# Altium PCB num_one.PcbDoc
Units mil, origin at the board's own origin, x right, y up, seen from the top; angles counter-clockwise.
Board outline 3346.46 x 2204.72 mil, 2 copper layers (Top Layer, Bottom Layer); 54 components, 46 nets, 282 pads, 101 vias.
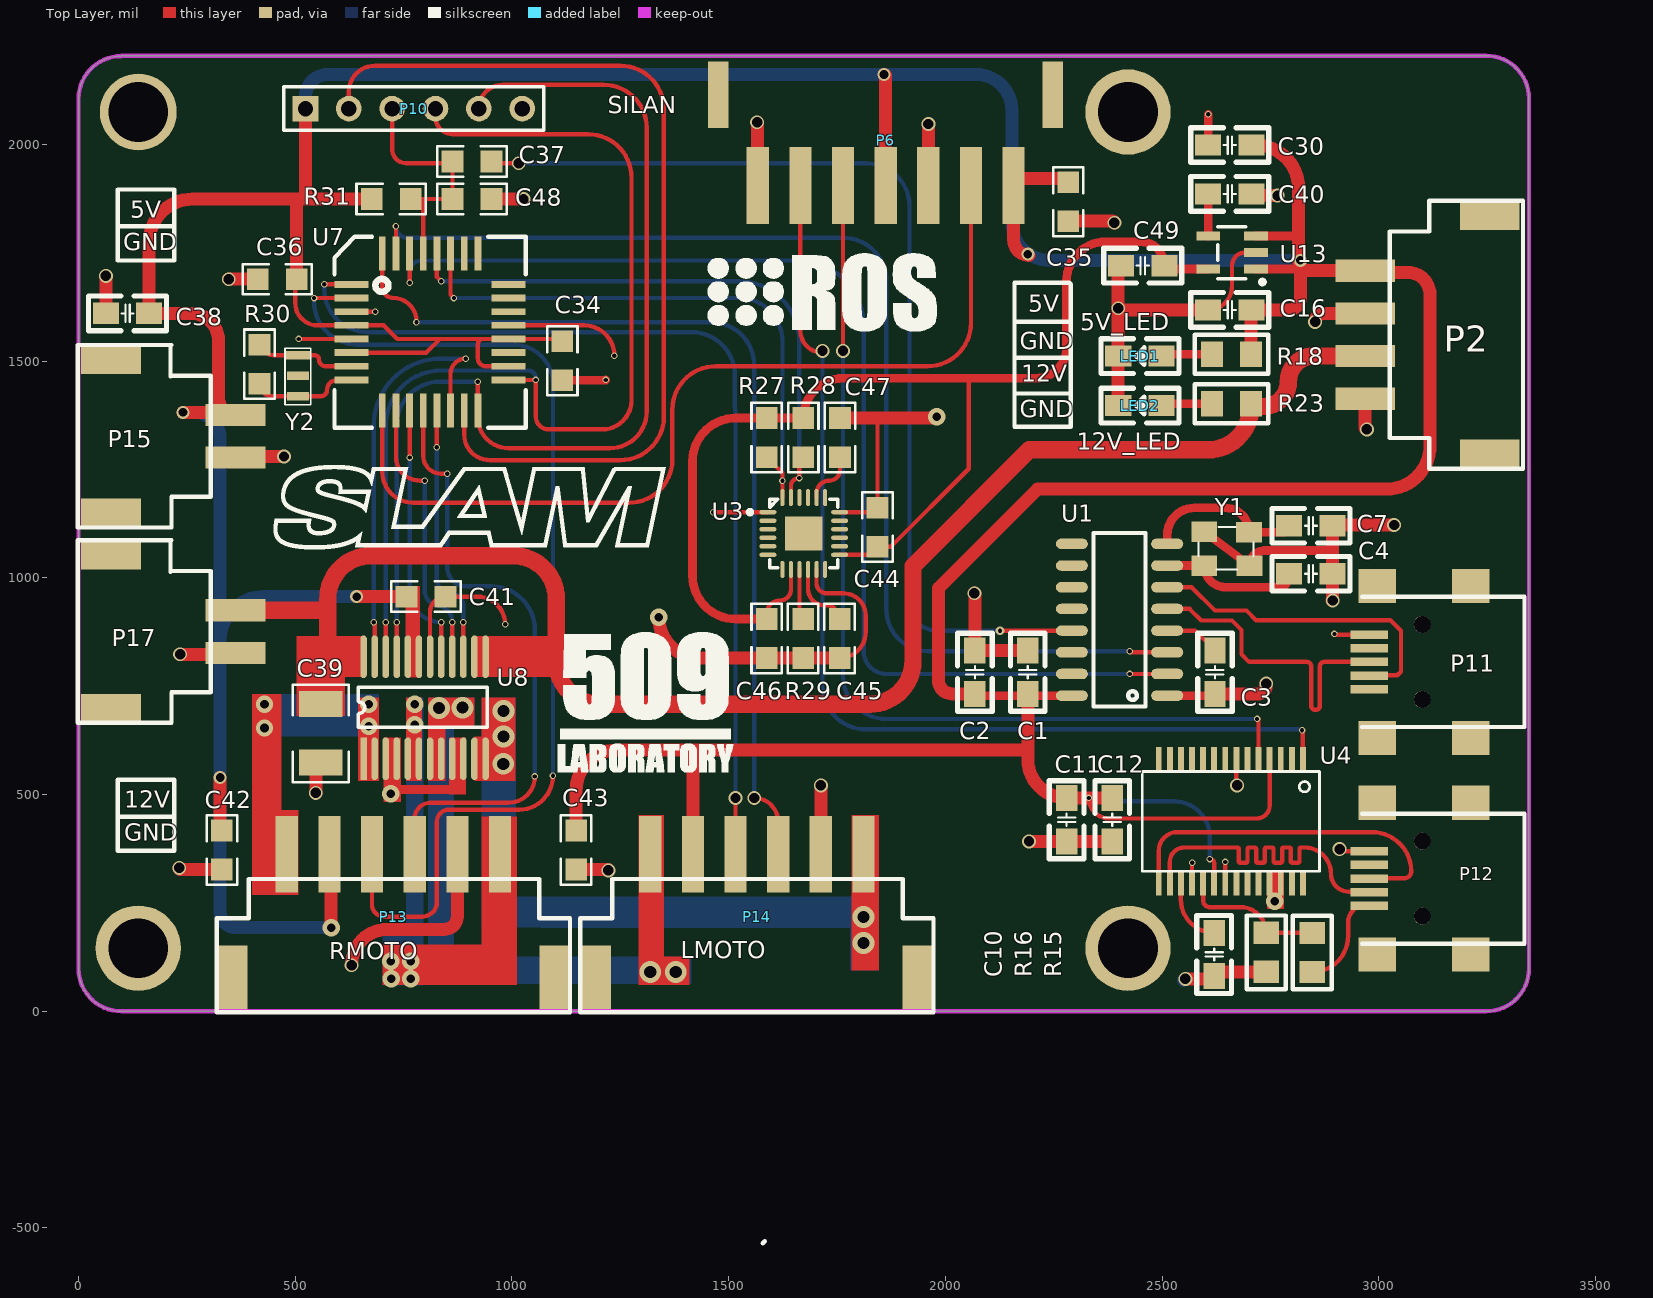
[diagram p0: Top Layer view]
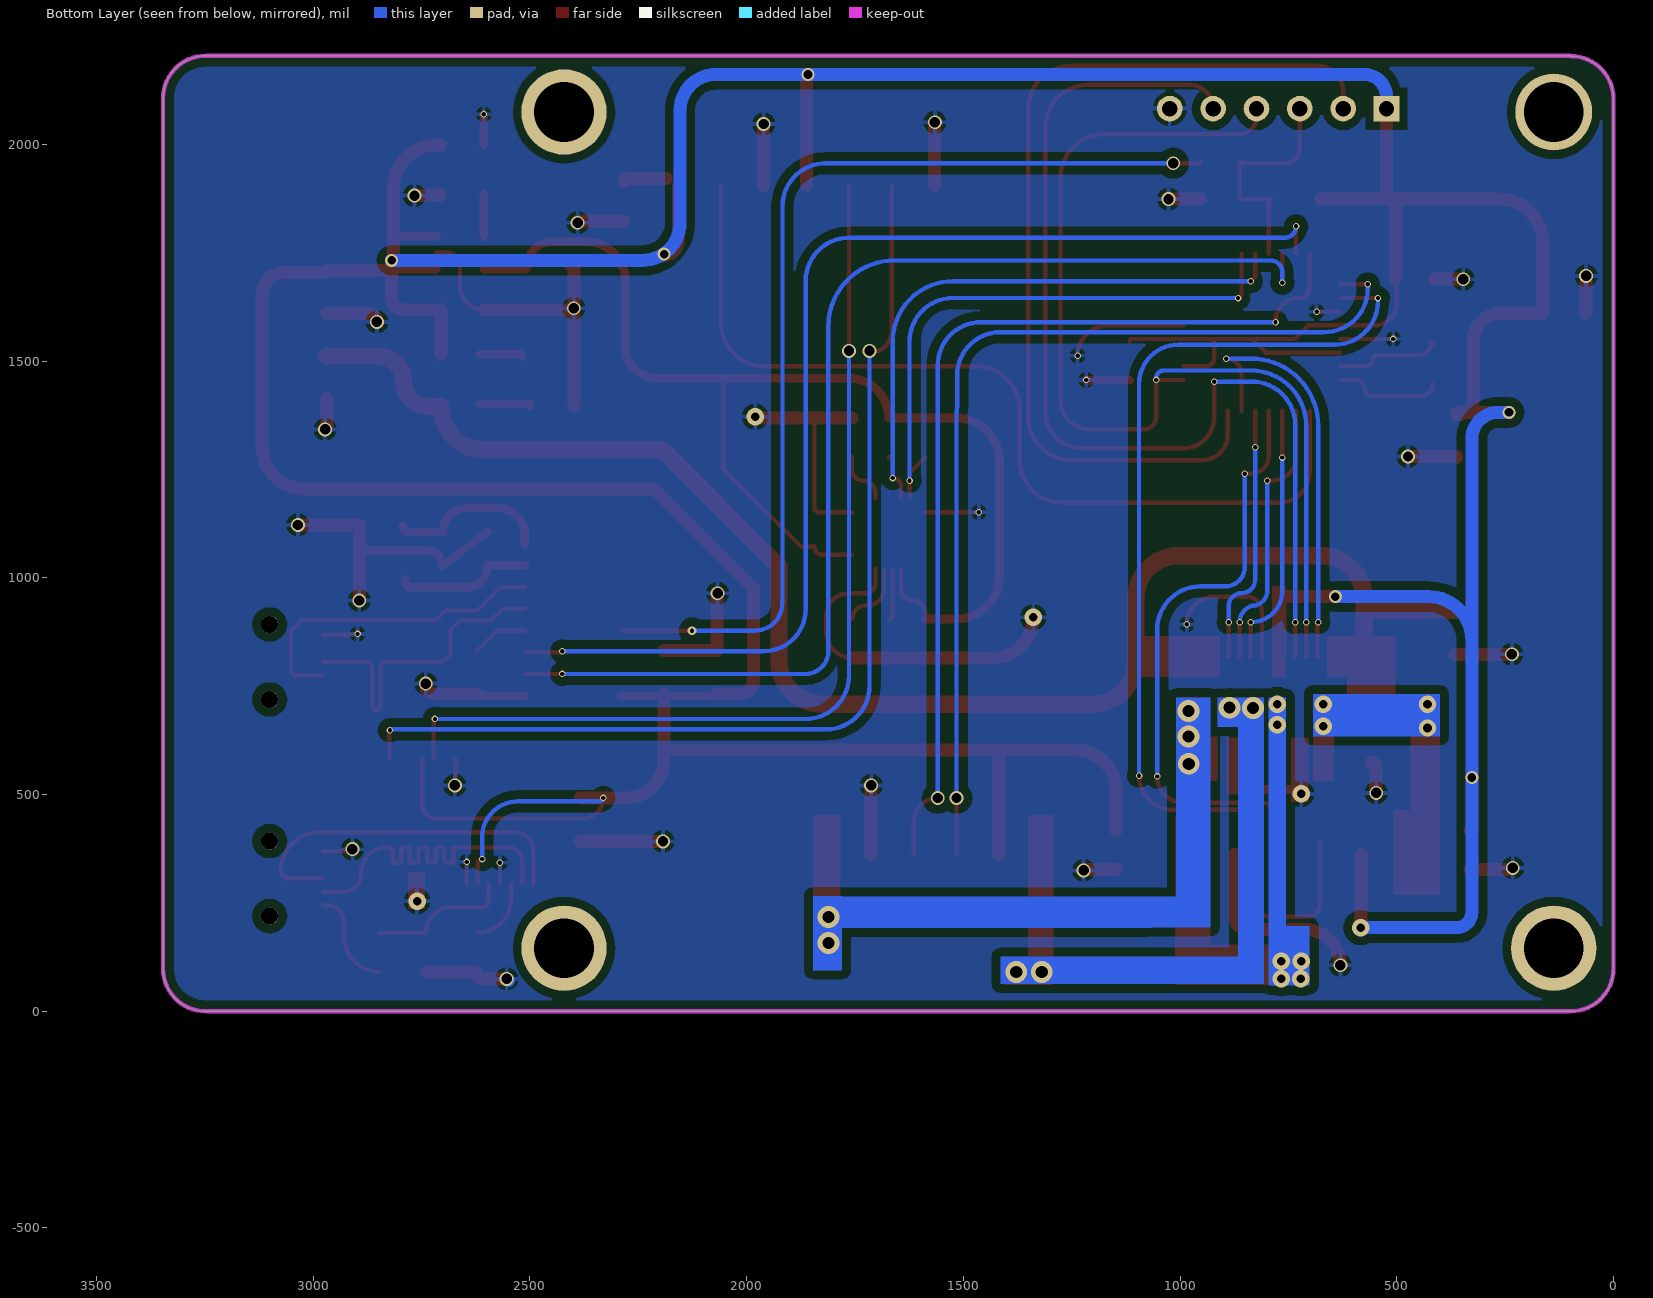
[diagram p1: Bottom Layer view, seen from below]

## Layer stack, top to bottom
Top Solder: solder mask 0.4, Solder Resist, Dk 3.5
Top Layer: signal copper 1.4
Dielectric 1: dielectric 12.6, FR-4, Dk 4.8
Bottom Layer: signal copper 1.4
Bottom Solder: solder mask 0.4, Solder Resist, Dk 3.5

## Board outline
0,98.43 0,2105.44 cw(c98.43,2105.44) 98.43,2203.87 98.43,2204.72 3248.03,2204.72 cw(c3248.03,2106.3) 3346.46,2106.3 3346.46,98.43 cw(c3248.03,98.43) 3248.03,0 98.43,0 cw(c98.43,98.43)

## Design rules (kind name [scope] priority, off if disabled: settings)
Clearance [All] p1: gap=6
ComponentClearance [All] p1: gap=0 collisioncheckmode=3 verticalgap=0 showdistances=FALSE
DiffPairsRouting [All] p1: maxlimit=10 minlimit=10 mostfreqgap=10 toplayer_minwidth=10 toplayer_maxwidth=15 toplayer_prefwidth=15 bottomlayer_minwidth=10 bottomlayer_maxwidth=15 bottomlayer_prefwidth=15 maxuncoupledlength=500
HoleSize [All] p1: absolutevalues=TRUE maxlimit=10000 minlimit=1 maxpercent=80.000 minpercent=20.000
HoleToHoleClearance [All] p1: gap=0 allowstackedmicrovias=TRUE
MinimumSolderMaskSliver [All] p1: minsoldermaskwidth=1
PlaneClearance [All] p1: clearance=78.74
PolygonConnect [All] p1: connectstyle=Relief reliefconductorwidth=10 reliefentries=4 polygonreliefangle="90 Angle" airgapwidth=10
RoutingCorners [All] p1: cornerstyle=Round minsetback=100 maxsetback=100
RoutingVias [All] p1: holewidth=10 width=20 viastyle="Through Hole" minholewidth=6 minwidth=10 maxholewidth=24 maxwidth=32
SMDNeckDown [All] p1: percent=100.000
SilkToSilkClearance [All] p1: silktosilkclearance=0
SilkToSolderMaskClearance [IsPad] p1: minsilkscreentomaskgap=1 clearancetoexposedcopper=TRUE
SolderMaskExpansion [All] p1: expansion=4
Width [All] p1: maxlimit=200 minlimit=10 preferedwidth=10
21 further rules are at their usual default settings.

## Components (designator, comment, footprint, x,y, rotation, side; value= is the part's Value field where it differs from the comment)
C1 "10uF" 0805C 2190.13,732.28 r90 top
C2 "0.1uF" 0805C 2068.08,732.28 r90 top
C3 "0.1uF" 0805C 2622.05,732.28 r90 top
C4 "22pF" 0805C 2793.35,1009.45 r0 top
C7 "22pF" 0805C 2793.35,1120.32 r0 top
C10 "0.1uF" 0805C 2620.16,181.1 r270 top
C11 "10uF" 0805C 2279.72,492.01 r270 top
C12 "0.1uF" 0805C 2384.86,492.01 r270 top
C16 "10uF" 0805C 2606.3,1618.11 r0 top
C30 "10uF" 0805C 2606.3,1998.7 r0 top
C34 "0.1uf" 0805 1116.14,1455.87 r90 top
C35 "0.1uF" 0805 2283.46,1822.83 r90 top
C36 "0.1uF" 0805 413.39,1688.98 r0 top
C37 "0.1uf" 0805 952.76,1960.63 r180 top
C38 "0.1uf" 0805C 62.99,1610.24 r0 top
C39 "220uF/35V" 1210 558.78,573.45 r90 top
C40 "0.1uf" 0805C 2706.3,1885.83 r180 top
C41 "0.1uF" 0805 846.46,956.69 r180 top
C42 "0.1uF" 0805 330.71,327.09 r90 top
C43 "0.1uF" 0805 1147.91,327.09 r90 top
C44 "0.1uF" 0805 1843.17,1072.09 r90 top
C45 "0.1uF" 0805 1755.87,814.96 r90 top
C46 "0.1uF" 0805 1587.62,814.96 r90 top
C47 "2200pf" 0805 1756.91,1278.65 r90 top
C48 "22pf" 0805 952.76,1874.02 r180 top
C49 "10uf" 0805C 2405.51,1720.47 r0 top
LED1 "5V_LED" 0805D 2448.82,1511.81 r180 top
LED2 "12V_LED" 0805D 2448.82,1397.64 r180 top
P2 "12V_5V_4A" 2.54-4P 2968.5,1708.66 r270 top
P6 "SILAN" "2.54-7P li" 1566.93,1905.51 r0 top
P10 "ISP" HDR1X6 523.62,2082.68 r0 top
P11 "MINIUSB" USB_MINI 2996.06,996.06 r270 top
P12 "MINIUSB" USB_MINI 2996.06,496.06 r270 top
P13 "RMOTO" 2.54-6P 972.44,362.2 r180 top
P14 "LMOTO" 2.54-6P 1811.02,362.2 r180 top
P15 "MOTO" 2.54-2P 362.2,1277.56 r90 top
P17 "MOTO" 2.54-2P 362.2,826.77 r90 top
R15 "4.7K" 0805_RES 2846.46,90.55 r90 top
R16 "10K" 0805_RES 2740.16,181.1 r270 top
R18 "1K" 0805_RES 2705.04,1515.75 r180 top
R23 "2.2K" 0805_RES 2705.04,1401.57 r180 top
R27 "4.7K" 0805 1587.62,1368.65 r270 top
R28 "4.7K" 0805 1672.27,1368.65 r270 top
R29 "4.7K" 0805 1671.75,814.96 r90 top
R30 "1M" 0805 417.32,1538.04 r270 top
R31 "100K" 0805 676.27,1874.02 r0 top
U1 "CH340G" SO-16_CH340 2511.81,728.35 r90 top
U3 "MPU6050" QFN24 1673.23,1102.36 r0 top locked
U4 "FT232RL" FT232RL 2653.54,438.05 r180 top
U7 "ATmega328" QFP32 629.92,1677.17 r0 top
U8 "TB6612FNG" SSOP24 657.48,582.68 r90 top
U13 "RT9193-33GB" SOT23-5 2716.54,1712.6 r90 top
Y1 "12MHz" XTAL-3225 2649.61,1066.93 r270 top
Y2 "16MHz" TCJZ-3 476.38,1529.45 r270 top

## Footprints (in the part's own frame and the unit in brackets; to place one, negate y for a bottom-side part, rotate by r counter-clockwise, add the part's x,y. Pads: shape width x height; smd on the part's side, far side on the other; paste and mask are expansions set on the pad)
2.54-2P [mm]
  rect 1.6x3.5 smd: 0(-3.2,7.3) 0(5.7,7.3)
  rect 1.3x3.5 smd: 1(0,0) 2(2.5,0)
  silkscreen extent -4.1,1.45 6.6,9.25
2.54-4P [mm]
  rect 1.6x3.5 smd: 0(-3.2,7.3) 0(10.7,7.3)
  rect 1.3x3.5 smd: 1(0,0) 2(2.5,0) 3(5,0) 4(7.5,0)
  silkscreen extent -4.1,1.45 11.6,9.25
2.54-6P [mm]
  rect 1.8x3.9 smd: 0(-3.2,7.3) 0(15.7,7.3)
  rect 1.3x4.5 smd: 1(0,0) 2(2.5,0) 3(5,0) 4(7.5,0) 5(10,0) 6(12.5,0)
  silkscreen extent -4.1,1.45 16.6,9.25
"2.54-7P li" [mm]
  rect 1.2x3.9 smd: 0(-2.3,5.3) 0(17.3,5.3)
  rect 1.3x4.5 smd: 1(0,0) 2(2.5,0) 3(5,0) 4(7.5,0) 5(10,0) 6(12.5,0) 7(15,0)
0805 [mil]
  rect 50x50 smd: 1(0,0) 2(90,0)
  silkscreen extent -35,-35 125,35
0805_RES [mm]
  rect 1.3x1.5 smd: 1(0,0) 2(2.286,0)
  silkscreen extent -1.02,-1.14 3.3,1.14, body extent 0.14,-0.63 2.14,0.63, height 0.55
0805C [mil]
  rect 60x49.21 smd: 1(0,0) 2(100,0)
  silkscreen extent -40,-40 140,40
0805D [mil]
  rect 60x49.21 smd: A(-50,0) K(50,0)
  silkscreen extent -90,-40 90,40
1210 [mil]
  rect 60x100 smd: 1(0,0) 2(135,0)
  silkscreen extent -45,-65 180,65
FT232RL [mil]
  rect 13.7x55 smd: 1(-171.34,-143.94) 2(-145.75,-143.94) 3(-120.16,-143.94) 4(-94.57,-143.94) 5(-68.98,-143.94) 6(-43.39,-143.94) 7(-17.8,-143.94) 8(7.8,-143.94) 9(33.39,-143.94) 10(58.98,-143.94) 11(84.57,-143.94) 12(110.16,-143.94) 13(135.75,-143.94) 14(161.34,-143.94) 15(161.34,143.94) 16(135.75,143.94) 17(110.16,143.94) 18(84.57,143.94) 19(58.98,143.94) 20(33.39,143.94) 21(7.8,143.94) 22(-17.8,143.94) 23(-43.39,143.94) 24(-68.98,143.94) 25(-94.57,143.94) 26(-120.16,143.94) 27(-145.75,143.94) 28(-171.34,143.94)
  silkscreen extent -210,-115 200,115
HDR1X6 [mm] "Connector; Header; 6 Position"
  rect 1.5x1.5 hole 0.9: 1(0,0)
  round 1.5 hole 0.9: 2(2.54,0) 3(5.08,0) 4(7.62,0) 5(10.16,0) 6(12.7,0)
  silkscreen extent -1.27,-1.27 13.97,1.27
QFN24 [mm]
  oval 1x0.25 smd: 1(-2.104,1.25) 2(-2.104,0.75) 3(-2.104,0.25) 4(-2.104,-0.25) 5(-2.104,-0.75) 6(-2.104,-1.25) 13(2.104,-1.25) 14(2.104,-0.75) 15(2.104,-0.25) 16(2.104,0.25) 17(2.104,0.75) 18(2.104,1.25)
  oval 0.25x1 smd: 7(-1.25,-2.104) 8(-0.75,-2.104) 9(-0.25,-2.104) 10(0.25,-2.104) 11(0.75,-2.104) 12(1.25,-2.104) 19(1.25,2.104) 20(0.75,2.104) 21(0.25,2.104) 22(-0.25,2.104) 23(-0.75,2.104) 24(-1.25,2.104)
  rect 2.2x2 smd: 25(0,0)
  silkscreen extent -3.28,-2 2,2, body extent -1.78,-1.78 1.78,1.78, height 0.25
QFP32 [mm]
  rect 2x0.4 smd: 1(0,0) 2(0,-0.8) 3(0,-1.6) 4(0,-2.4) 5(0,-3.2) 6(0,-4) 7(0,-4.8) 8(0,-5.6) 17(9.2,-5.6) 18(9.2,-4.8) 19(9.2,-4) 20(9.2,-3.2) 21(9.2,-2.4) 22(9.2,-1.6) 23(9.2,-0.8) 24(9.2,0)
  rect 0.4x2 smd: 9(1.8,-7.4) 10(2.6,-7.4) 11(3.4,-7.4) 12(4.2,-7.4) 13(5,-7.4) 14(5.8,-7.4) 15(6.6,-7.4) 16(7.4,-7.4) 25(7.4,1.8) 26(6.6,1.8) 27(5.8,1.8) 28(5,1.8) 29(4.2,1.8) 30(3.4,1.8) 31(2.6,1.8) 32(1.8,1.8)
  silkscreen extent -1,-8.4 10.2,2.8
SO-16_CH340 [mil]
  oval 24x74 smd: 1(0,0) 2(50,0) 3(100,0) 4(150,0) 5(200,0) 6(250,0) 7(300,0) 8(350,0) 9(350,220) 10(300,220) 11(250,220) 12(200,220) 13(150,220) 14(100,220) 15(50,220) 16(0,220)
  silkscreen extent -25,50 375,170, body extent -19,-5 367,223, height 69
SOT23-5 [mil]
  rect 20x55 smd: 1(0,0) 2(38,0) 3(76,0) 4(76,110) 5(0,110)
  silkscreen extent -35,-20 98,88
SSOP24 [mm]
  rect 2.5x0.381 smd: 1(0,0)
  oval 2.5x0.381 smd: 2(0,-0.65) 3(0,-1.3) 4(0,-1.95) 5(0,-2.6) 6(0,-3.25) 7(0,-3.9) 8(0,-4.55) 9(0,-5.2) 10(0,-5.85) 11(0,-6.5) 12(0,-7.15) 13(5.975,-7.15) 14(5.975,-6.5) 15(5.975,-5.85) 16(5.975,-5.2) 17(5.975,-4.55) 18(5.975,-3.9) 19(5.975,-3.25) 20(5.975,-2.6) 21(5.975,-1.95) 22(5.975,-1.3) 23(5.975,-0.65) 24(5.975,0)
  silkscreen extent 1.85,-7.24 4.2,0.32
TCJZ-3 [mm]
  rect 0.5x1.4 smd: 1(0.4,0.762)
  rect 0.5x1.3 smd: 2(1.6,0.762) 3(2.8,0.762)
  silkscreen extent 0,0 3.3,1.5
USB_MINI [mm]
  rect 2x2.2 smd: 0(0.376,5.5) 0(0.376,0) 0(9.276,0) ""(9.276,5.5)
  rect 0.5x2.2 smd: 1(6.426,-0.45) 2(5.626,-0.45) 3(4.826,-0.45) 4(3.226,-0.45) NC(4.026,-0.45)
  round 1 hole 1: ""(2.626,2.65) ""(7.026,2.65)
  silkscreen extent 1.02,-0.89 8.64,8.64
XTAL-3225 [mil]
  rect 47.24x59.06 smd: 1(-38.5,51) 2(-39.5,-52) 3(39.5,-52) 4(38.5,52)
  silkscreen extent -50,-65 48,61, body extent -50,-65 48,61, height 31

## Part data
C1 C2 C3 C4 C7 C10 C11 C12 C16 C30: library part CAP
C34 C35 C36 C37 C39 C41 C42 C43 C48: library part Cap
C38: library part Cap, "capacitor"
C40 C49: library part Cap, "Capacitor"
C44 C45 C46 C47: library part Cap, "0805贴片电容"
LED1 LED2: library part LED
P2: library part "Header 4", "Header, 4-Pin"
P6: library part "Header 7", "Header, 7-Pin"
P10: library part "Header 6", "2.54-6P排针"
P11 P12: library part USB-B, "贴片"
P13 P14: library part "Header 6", "2.54-6P卧贴"
P15 P17: library part 2P, "3.81-2P"
R15 R16 R18 R23 R27 R28: library part RES
R29: library part Res2, "Resistor"
R30 R31: library part Res2
U1 U4: "USBоƬ"
U7: library part ATmega8-16AC, "8位单片机"
U8: library part TB6612, "电机驱动芯片"
U13: library part RT9193, "电源芯片"
Y1: library part XTAL, "有源晶振"
Y2: library part XTAL, "3212村田陶瓷晶振"

## Free pads (board coordinates)
  round 177.17 hole 137.8: 1(137.8,2074.8)
  round 196.85 hole 137.8: 2(137.79,145.67) 3(2421.26,145.67) 4(2421.26,2074.8)

## Via types
v1: diameter 15, hole 10, Top Layer to Bottom Layer, 40 vias
v2: diameter 32, hole 24, Top Layer to Bottom Layer, 30 vias
v3: diameter 40, hole 20, Top Layer to Bottom Layer, 15 vias
v4: diameter 50, hole 28, Top Layer to Bottom Layer, 9 vias
v5: diameter 30, hole 20, Top Layer to Bottom Layer, 6 vias
v6: diameter 20, hole 10, Top Layer to Bottom Layer, 1 vias

## Nets (pads, with @x,y where several pads share a name; then routed paths per layer and width w, separated by ;. In a path a pad name is that pad's centre, name@x,y a point inside that pad or via, vN(x,y) a via of type N, cw(c..) or ccw(c..) an arc to the next point about the centre after c; other vN are vias at no path point)
2: P14.3 U7.32 | length 2198.8
  Top Layer w10: U7.32 700.79,1671.17 ccw(c726.29,1671.17) 726.29,1645.67 cw(c726.29,1592.43) 779.53,1592.43 v1(779.53,1589.96) ; v2(1559.06,492.13) cw(c1559.06,437.01) 1614.17,437.01 P14.3
  Bottom Layer w10: v1(779.53,1589.96) 1459.06,1589.96 cw(c1459.06,1489.96) 1559.06,1489.96 v2(1559.06,492.13)
3: P14.4 U7.1 | length 2239.6
  Top Layer w10: v1(566.93,1677.17) U7.1 ; P14.4 v2(1515.75,492.13)
  Bottom Layer w10: v1(566.93,1677.17) 566.93,1666.93 ccw(c666.93,1666.93) 666.93,1566.93 1414.36,1566.93 cw(c1414.36,1466.93) 1514.36,1466.93 1514.36,1393.98 cw(c1357.29,1373.03) 1515.75,1373.03 v2(1515.75,492.13)
4: P13.4 U7.2 | length 2500.9
  Top Layer w10: v1(543.31,1645.67) U7.2 ; P13.4@677.17,390.51 P13.4 677.17,246 ccw(c704.72,246) 677.19,244.91 ccw(c704.72,246) 704.72,218.44 793.18,218.44 ccw(c793.18,251.97) 826.71,251.97 826.71,437.38 cw(c854.33,437.38) 854.33,465 1016.18,465 ccw(c1016.18,543.31) v1(1094.49,543.31)
  Bottom Layer w10: v1(543.31,1645.67) 543.31,1638.04 ccw(c643.31,1638.04) 643.31,1538.04 1003.94,1538.04 cw(c1003.94,1447.49) 1094.49,1447.49 v1(1094.49,543.31)
5: P6.6 U7.9 | length 2143.7
  Top Layer w10: U7.9 700.79,1244.78 ccw(c772.34,1244.78) 772.34,1173.23 1270.08,1173.23 ccw(c1270.08,1273.23) 1370.08,1273.23 1370.08,1388.19 cw(c1470.08,1388.19) 1470.08,1488.19 1959.06,1488.19 ccw(c1959.06,1588.19) 2059.06,1588.19 P6.6
5V: C1.1 C2.1 C11.1 C12.1 C16.2 C30.2 C34.2 C35.2 C36.2 C38.2 C41.2 C42.2 C43.2 P2.1 P6.4 P6.7 P10.1 P13.5 P14.5 P15.2 R18.1 R31.1 U1.16 U4.4 U4.20 U7.4 U7.6 U7.18 U7.20 U8.19 U8.20 U13.1 U13.3 | length 14606
  Top Layer w10: C36.2 ccw(c503.39,1685.59) 500,1685.59 500,1633.86 ccw(c551.18,1633.86) 551.18,1582.68 U7.4 703.75,1582.68 735.25,1551.18 833.87,1551.18 ; U7.6 802.37,1519.69 833.87,1551.18 ; C41.2@759.84,953.31 U8.20 U8.19 ; U7.18 939.57,1488.19 cw(c939.57,1506.5) 921.26,1506.5 921.26,1539.37 cw(c933.07,1539.37) 933.07,1551.18 ; C34.2 ccw(c1110.83,1545.87) 1110.83,1551.18 U7.20 933.07,1551.18 ; v1@2330.71,492.01 ccw(c2377.83,492.01) 2377.83,444.88 2718.87,444.88 ccw(c2718.87,474.12) 2748.11,474.12 U4.4 ; v1(2610.24,351.3) cw(c2610.24,341.38) 2620.16,341.38 ; U4.20 2620.16,340.61 ; 833.87,1551.18 933.07,1551.18
  Top Layer w20: C41.2 cw(c756.46,953.31) C41.2@759.84,953.31 ; C2.1 ccw(c2072.02,732.28) 2072.02,728.35 2190.13,728.35 U1.16 ; U13.1 2814.96,1712.6 ; U13.3 2812.98,1788.6 ccw(c2812.98,1790.58) 2814.96,1790.58
  Top Layer w30: v5(240.86,1381.89) P15.2@341.47,1381.89 ; v5(326.77,539.37) 326.77,421.02 ccw(c330.71,421.02) C42.2 ; C36.2 503.39,1870.63 ccw(c500,1870.63) 500,1874.02 ; P10.1 523.62,1877.95 cw(c519.69,1877.95) 519.69,1874.02 ; P13.5 cw(c578.74,358.27) 582.68,358.27 v3(582.68,192.91) ; v5(641.73,956.69) C41.2 ; R31.1 519.69,1874.02 ; C43.2 1147.91,510.12 cw(c1240.16,510.12) 1240.16,602.36 1417.32,602.36 ; P14.5 1417.32,602.36 ; v5(1858.27,2161.42) cw(c1858.27,2157.48) 1862.2,2157.48 P6.4 ; C2.1 2015.75,732.28 cw(c2015.75,763.78) 1984.25,763.78 1984.25,976.38 2212.6,1204.72 3018.11,1204.72 ccw(c3018.11,1304.72) 3118.11,1304.72 3118.11,1653.54 ccw(c3066.93,1653.54) 3066.93,1704.72 2972.44,1704.72 cw(c2972.44,1708.66) P2.1 2838.9,1708.66 cw(c2838.9,1732.6) v5@2818.9,1719.45 ; P6.7 2157.48,1779.53 ccw(c2192.91,1779.53) 2192.91,1744.09 cw(c2192.91,1746.88) v5(2190.13,1746.88) ; 2185.04,1921.26 2275.04,1921.26 cw(c2275.04,1912.83) C35.2 ; C1.1 2190.13,728.35 2190.13,606.3 ; v1@2330.71,492.01 C12.1 ; v1(2330.71,492.13) 2279.72,492.13 C11.1 cw(c2279.72,581.6) 2190.13,581.6 2190.13,606.3 ; R18.1 2705.04,1616.85 cw(c2706.3,1616.85) C16.2 2791.34,1618.11 ccw(c2791.34,1645.67) 2818.9,1645.67 v5@2818.9,1719.45 ; C30.2 2714.96,1998.7 cw(c2714.96,1898.7) 2814.96,1898.7 2814.96,1790.58 2814.96,1732.6 ccw(c2838.9,1732.6) v5@2818.9,1719.45 ; P15.2@341.47,1381.89 cw(c362.2,1415.35) 322.83,1415.35 322.83,1547.24 ccw(c259.84,1547.24) 259.84,1610.24 C38.2 162.99,1774.02 cw(c262.99,1774.02) 262.99,1874.02 500,1874.02 ; P15.2@341.47,1381.89 ccw(c362.2,1415.35) P15.2 ccw(c356.3,1375.98) 356.3,1381.89 P15.2@341.47,1381.89 ; 500,1874.02 519.69,1874.02 ; 1417.32,602.36 2186.19,602.36 ccw(c2186.19,606.3) 2190.13,606.3
  Bottom Layer w10: v1(2330.71,492.13) ccw(c2338.58,492.13) 2338.58,484.25 2527.56,484.25 cw(c2527.56,401.57) 2610.24,401.57 v1(2610.24,351.3)
  Bottom Layer w30: v5(240.86,1381.89) 265.75,1381.89 cw(c265.75,1320.87) 326.77,1320.87 326.77,856.69 ; P10.1 523.62,2110.24 cw(c574.8,2110.24) 574.8,2161.42 v5(1858.27,2161.42) 2070.87,2161.42 cw(c2070.87,2078.74) 2153.54,2078.74 2153.54,1819.21 ccw(c2240.16,1819.21) 2240.16,1732.6 v5(2818.9,1732.6) ; v3(582.68,192.91) 362.2,192.91 cw(c362.2,228.35) 326.77,228.35 v5(326.77,539.37) 326.77,856.69 ; v5(641.73,956.69) 426.77,956.69 ccw(c426.77,856.69) 326.77,856.69
6: U7.10 U8.16 | length 643.8
  Top Layer w10: U7.10 732.28,1279.53 ccw(c787.4,1279.53) 787.4,1224.41 v1(798.64,1224.41) ; U8.16 v1(862.2,897.64)
  Bottom Layer w10: v1(798.64,1224.41) 798.64,970.85 ccw(c833.87,970.85) 824.1,937 ccw(c833.87,970.85) 833.87,935.62 cw(c823.62,898.43) 862.2,898.43 v1(862.2,897.64)
7: U7.11 U8.17 | length 609.5
  Top Layer w10: v1(763.78,1277.56) U7.11 ; U8.17 v1(836.61,897.64)
  Bottom Layer w10: v1(763.78,1277.56) 763.78,970.47 ccw(c836.61,970.47) v1(836.61,897.64)
8: P13.3 U7.12 | length 1440.8
  Top Layer w10: P13.3@775.59,358.27 P13.3 775.59,445.63 cw(c811.02,445.63) 811.02,481.06 992.13,481.06 ccw(c992.13,541.69) v1(1052.75,541.69) ; U7.12 795.28,1281.5 ccw(c836.61,1281.5) 836.61,1240.16 v1(850.39,1240.16)
  Bottom Layer w10: v1(850.39,1240.16) 850.39,1025.8 ccw(c895.89,1025.8) 895.89,980.3 952.75,980.3 cw(c952.75,880.3) 1052.75,880.3 v1(1052.75,541.69)
9: U7.13 U8.15 | length 602.7
  Top Layer w10: v1(826.77,1301.18) U7.13 ; U8.15 v1(887.8,897.64)
  Bottom Layer w10: v1(826.77,1301.18) 826.77,996.06 ccw(c858.27,996.06) 858.27,964.57 cw(c858.27,935.04) 887.8,935.04 v1(887.8,897.64)
10: U7.14 U8.23 | length 975.4
  Top Layer w10: v1(681.1,897.64) cw(c681.1,895.67) 683.07,895.67 U8.23 ; U7.14 858.27,1470.47 cw(c893.7,1470.47) v1(893.7,1505.91)
  Bottom Layer w10: v1(681.1,897.64) 681.1,1350.79 cw(c836.22,1350.79) 836.22,1505.91 v1(893.7,1505.91)
11: P10.2 U7.15 | length 2173.6
  Top Layer w10: P10.2 623.62,2122.08 cw(c683.07,2122.08) 683.07,2181.52 1250.39,2181.52 cw(c1250.39,2081.52) 1350.39,2081.52 1350.39,1371.65 cw(c1250.39,1371.65) 1250.39,1271.65 948.82,1271.65 cw(c948.82,1330.71) 889.76,1330.71 889.76,1340.94 U7.15
12: P10.5 U7.16 U8.21 | length 2476.1
  Top Layer w10: U8.21 v1(734.25,897.64) ; v1(921.26,1452.76) U7.16 921.26,1370.08 ccw(c992.13,1370.08) 992.13,1299.21 1225.91,1299.21 ccw(c1225.91,1384.33) 1311.02,1384.33 1311.02,2037.8 ccw(c1211.02,2037.8) 1211.02,2137.8 978.74,2137.8 ccw(c978.74,2082.68) P10.5 P10.5@923.62,2076.38
  Bottom Layer w10: v1(734.25,897.64) 734.25,1352.76 cw(c834.25,1352.76) 834.25,1452.76 v1(921.26,1452.76)
12V: C39.2 P2.3 P17.2 R23.1 U8.13 U8.14 U8.24 | length 3588.4
  Top Layer w30: C39.2@535.43,731.8 ccw(c558.78,731.8) C39.2
  Top Layer w40: P17.2 563.35,925.2 574.8,913.74 ; 574.8,834.65 574.8,913.74 ; P2.3 2850.39,1511.81 ccw(c2850.39,1452.76) 2791.34,1452.76 cw(c2733.86,1452.76) 2733.86,1395.28 2705.04,1395.28 cw(c2605.04,1395.28) 2605.04,1295.28 2193.78,1295.28 1925.2,1026.69 1925.2,808.45 cw(c1825.2,808.45) 1825.2,708.45 1202.36,708.45 cw(c1202.36,808.45) 1102.36,808.45 1102.36,951.18 ccw(c1002.36,951.18) 1002.36,1051.18 674.8,1051.18 ccw(c674.8,951.18) 574.8,951.18 574.8,913.74
13: P10.4 U7.17 U8.22 | length 2471.5
  Top Layer w10: U8.22 v1(708.66,897.64) ; P10.4@823.62,2099.21 P10.4 823.62,2062.76 ccw(c862.76,2062.76) 862.76,2023.62 1175.59,2023.62 cw(c1175.59,1923.62) 1275.59,1923.62 1275.59,1409.45 cw(c1208.66,1409.45) 1208.66,1342.52 1084.25,1342.52 cw(c1084.25,1371.65) 1055.12,1371.65 v1(1055.12,1456.69) U7.17
  Bottom Layer w10: v1(708.66,897.64) 708.66,1350.79 cw(c836.22,1350.79) 836.22,1478.35 1037.4,1478.35 cw(c1037.4,1460.63) 1055.12,1460.63 v1(1055.12,1456.69)
AO1: P13.6 U8.1 U8.2
  other v3: 429.13,653.54 669.29,657.48 429.13,708.66 669.29,708.66
AO2: P13.1 U8.5 U8.6
  other v3: 721.46,74.8 766.5,74.8 720.47,115.53 766.34,115.53 775.59,661.42 775.59,708.66
BO1: P14.1 U8.11 U8.12 | length 956.9
  Bottom Layer w50: 979.71,352.13 v4(979.71,570.87) ; 1072.82,217.6 v4(1811.02,217.6)
  other v4: 1811.02,157.48 980.32,633.86 980.32,692.91
BO2: P14.6 U8.7 U8.8
  other v4: 1318.9,90.55 1377.95,90.55 831.65,699.84 885.83,700.5
DTR: C37.1 U1.13 | length 2349.4
  Top Layer w10: C37.1 ccw(c956.69,1960.63) 956.69,1956.69 v2(1015.75,1956.69) ; v6(2125.98,878.35) U1.13
  Bottom Layer w10: v2(1015.75,1956.69) 1817.32,1956.69 cw(c1817.32,1856.69) 1917.32,1856.69 1917.32,948.82 ccw(c1988.19,948.82) 1917.76,940.99 ccw(c1980.4,940.99) 1980.4,878.35 v6(2125.98,878.35)
GND: C1.2 C2.2 C3.1 C4.2 C7.2 C10.2 C11.2 C12.2 C16.1 C30.1 C34.1 C35.1 C36.1 C38.1 C39.1 C40.1 C41.1 C42.1 C43.1 C44.2 C45.1 C46.1 C47.2 C48.1 C49.1 LED1.K LED2.K P2.2 P2.4 P6.1 P6.5 P10.6 P11.4 P12.4 P13.2 P14.2 P15.1 P17.1 R16.2 R29.1 U1.1 U3.1 U3.11 U3.18 U4.7 U4.18 U4.21 U4.25 U4.26 U7.3 U7.5 U7.21 U8.3 U8.4 U8.9 U8.10 U8.18 U13.2 Y1.2 Y1.4 | length 7171.9
  Top Layer w10: v1(507.87,1551.18) U7.5 ; U7.3 v1(684.79,1614.17) ; U8.18 811.02,921.26 cw(c846.46,921.26) C41.1 920.26,956.69 cw(c920.26,892.7) v1(984.25,892.7) ; U7.21 1166.09,1582.68 cw(c1166.09,1512.55) v1(1236.22,1512.55) ; v1(1464.17,1151.57) U3.1 ; U3.11 1702.76,987.52 ccw(c1725.71,987.52) 1725.71,964.57 1764.12,964.57 cw(c1764.12,912.51) 1816.17,912.51 1816.17,875.26 cw(c1755.87,875.26) 1799.08,833.19 cw(c1755.87,875.26) C45.1 ; U3.18 1832.66,1151.57 ccw(c1832.66,1162.09) C44.2 1843.17,1364.06 ccw(c1838.58,1364.06) 1838.58,1368.65 ; U4.18 2568.98,342.65 v1(2569.2,342.65) ; C16.1 ccw(c2606.3,1673.23) 2661.42,1673.23 2661.42,1720.47 cw(c2691.54,1720.47) 2691.54,1750.6 U13.2 ; U4.21 2645.75,344.57 v1(2645.85,344.57) ; U4.7 2671.34,523 ccw(c2673.23,523) v2(2673.23,521.11) ; v1(2897.64,870.51) ccw(c2899.1,870.51) 2899.1,869.06 P11.4 ; v2(2909.45,374.02) v2(2909.45,374.02) ccw(c2914.35,373.95) 2914.35,369.06 P12.4
  Top Layer w20: v3(720.47,501.52) cw(c730.69,501.52) 730.69,511.74 870.08,511.74 ; C34.1 1215.71,1455.87 ccw(c1215.71,1456.69) v1(1216.54,1456.69) ; U1.1 2618.11,728.35 ccw(c2618.11,732.28) C3.1 ; Y1.2 Y1.4 cw(c2736.17,1028.43) 2736.17,1062.99 2893.35,1062.99 ; C30.1 v1(2606.3,2069.75)
  Top Layer w30: C38.1 v2(62.99,1696.78) ; v2(232.28,330.7) ccw(c235.9,330.7) 235.9,327.09 C42.1 ; v2@234.18,823.74 v2(234.33,823.74) P17.1@365.23,823.74 ; v2(346.46,1688.98) C36.1 ; P15.1 cw(c364.6,1277.56) 364.6,1279.96 v2(474.09,1279.96) ; v2(547.24,503.92) 547.24,561.91 cw(c558.78,561.91) C39.1 ; v2(629.92,106.3) cw(c712.6,106.3) 712.6,188.98 843.79,188.98 ccw(c843.79,219.2) 874.02,219.2 P13.2 ; C48.1 v2(1026.61,1874.02) ; C43.1 1220.34,327.09 cw(c1220.34,324.95) v2(1222.47,324.95) ; v3(1338.69,908.95) ccw(c1432.68,908.95) 1432.68,814.96 C46.1 R29.1 C45.1 ; v2(1565.61,2051.18) cw(c1565.61,2049.86) 1566.93,2049.86 P6.1 ; P14.2 v2(1712.6,521.11) ; C47.2 1838.58,1368.65 1977.17,1368.65 ccw(c1977.17,1371.65) v3(1980.17,1371.65) ; P6.5 v2(1960.63,2047.24) ; v2(2066.93,964.57) cw(c2066.93,963.41) 2068.08,963.41 C2.2 C1.2 ; v2(2192.91,392.01) C11.2 C12.2 ; C35.1 2385.83,1822.83 cw(c2385.83,1818.9) 2389.76,1818.9 v2(2389.76,1819.21) ; LED2.K LED1.K v2(2398.82,1622.05) ; C49.1 ccw(c2405.51,1713.78) 2398.82,1713.78 v2(2398.82,1622.05) ; v2(2553.6,74.8) 2613.86,74.8 ccw(c2613.86,81.1) C10.2 cw(c2630.16,81.1) 2630.16,91.1 R16.2 ; C16.1 2402.76,1618.11 cw(c2402.76,1622.05) v2(2398.82,1622.05) ; C3.1 2720.89,732.28 ccw(c2720.89,751.55) 2740.16,751.55 v2(2740.16,755.91) ; C40.1 ccw(c2710.24,1885.83) 2710.24,1881.89 v2(2766.35,1881.89) ; v2(2853,1590.55) cw(c2872.68,1590.55) 2872.68,1610.24 P2.2 ; v2(2893.7,947.67) 2892.61,947.67 cw(c2892.61,948.82) 2891.46,948.82 ccw(c2891.46,950.71) 2893.35,950.71 C4.2 2893.35,1062.99 C7.2 cw(c2895.08,1120.32) 2895.08,1122.05 v2(3035.43,1122.05) ; P2.4 2968.5,1346.46 ccw(c2972.44,1346.46) v2(2972.44,1342.52)
  Bottom Layer w30: v2@2549.66,70.87 cw(c2553.6,70.87) v2(2553.6,74.8)
  other v3: 2760.16,254.11
MXTAL0: C4.1 U1.7 Y1.3 | length 315.1
  Top Layer w20: U1.7 2596.69,1028.35 cw(c2596.69,1027.43) Y1.3 ccw(c2646.69,1027.43) 2646.69,978.35 2772.12,978.35 ccw(c2772.12,995.06) C4.1@2788.84,995.06
MXTAL1: C7.1 U1.8 Y1.1 | length 378.5
  Top Layer w20: U1.8 2511.81,1098.43 cw(c2574.8,1098.43) 2574.8,1161.42 2645.67,1161.42 cw(c2645.67,1106.48) 2688.98,1140.28 cw(c2645.67,1106.48) 2700.61,1106.48 Y1.1 2778.46,1105.43 ccw(c2778.46,1120.32) C7.1
NetC3_2: C3.2 U1.4 | length 129.3
  Top Layer w10: U1.4 2575.98,878.35 C3.2
NetC10_1: C10.1 U4.17 | length 156.8
  Top Layer w10: U4.17 2543.39,257.87 ccw(c2620.16,257.87) C10.1
NetC40_2: C40.2 U13.4 | length 97.5
  Top Layer w20: C40.2 2606.54,1885.83 U13.4
NetC45_2: C45.2 U3.10 | length 157.6
  Top Layer w10: U3.10 1683.07,974.29 ccw(c1720.56,974.29) 1716.68,937.01 ccw(c1720.56,974.29) 1720.56,936.81 1724.03,936.81 cw(c1724.03,904.96) 1755.86,905.77 cw(c1724.03,904.96) C45.2
NetC47_1: C47.1 U3.20 | length 124.4
  Top Layer w10: U3.20 1702.76,1194.88 cw(c1732.28,1194.88) 1732.28,1224.41 ccw(c1732.28,1249.04) 1756.91,1249.04 C47.1
NetLED1_A: LED1.A R18.2 | length 98.8
  Top Layer w20: LED1.A@2518.44,1511.81 cw(c2522.38,1511.81) 2522.38,1515.75 R18.2
NetLED2_A: LED2.A R23.2 | length 118.5
  Top Layer w20: LED2.A cw(c2502.76,1397.64) 2502.76,1401.57 R23.2
NetP11_2: P11.2 U1.6 | length 753.1
  Top Layer w10: U1.6 2568.13,978.35 2621.92,924.55 2694.59,924.55 2716.71,902.43 3026.7,902.43 3051.18,877.95 3051.18,783.46 3042.78,775.06 P11.2@2977,775.06
NetP11_3: P11.3 U1.5 | length 753.1
  Top Layer w10: U1.5 2563.52,928.35 2590.29,901.57 2661.42,901.57 2683.15,879.85 2683.15,823.74 2700.83,806.06 2751.97,806.06 2834.02,806.06 cw(c2834.02,796.06) 2844.02,796.06 2844.02,705.28 ccw(c2854.02,705.28) 2854.02,695.28 ccw(c2854.02,705.28) 2864.02,705.28 2864.02,796.06 cw(c2874.02,796.06) 2874.02,806.06 P11.3@2977,806.06
NetP12_1: P12.1 R15.1 | length 232.1
  Top Layer w10: R15.1 ccw(c2846.46,173.23) 2929.13,173.23 2929.13,204.72 cw(c2969.13,204.72) 2969.13,244.73 P12.1@2977,244.73
NetP12_2: P12.2 U4.16 | length 842
  Top Layer w10: U4.16 2517.8,344.57 cw(c2551.18,344.57) 2551.18,377.95 2566.93,377.95 2576.93,377.95 2596.93,377.95 2616.93,377.95 2636.93,377.95 2656.93,377.95 2672.93,377.95 cw(c2672.93,373.95) 2676.93,373.95 2676.93,346.65 ccw(c2680.93,346.65) 2680.93,342.65 2692.93,342.65 ccw(c2692.93,346.65) 2696.93,346.65 2696.93,373.95 cw(c2700.93,373.95) 2700.93,377.95 2712.93,377.95 cw(c2712.93,373.95) 2716.93,373.95 2716.93,346.65 ccw(c2720.93,346.65) 2720.93,342.65 2732.93,342.65 ccw(c2732.93,346.65) 2736.93,346.65 2736.93,373.95 cw(c2740.93,373.95) 2740.93,377.95 2752.93,377.95 cw(c2752.93,373.95) 2756.93,373.95 2756.93,346.65 ccw(c2760.93,346.65) 2760.93,342.65 2772.93,342.65 ccw(c2772.93,346.65) 2776.93,346.65 2776.93,373.95 cw(c2780.93,373.95) 2780.93,377.95 2792.93,377.95 cw(c2792.93,373.95) 2796.93,373.95 2796.93,346.65 ccw(c2800.93,346.65) 2800.93,342.65 2812.93,342.65 ccw(c2812.93,346.65) 2816.93,346.65 2816.93,373.95 cw(c2820.93,373.95) 2820.93,377.95 2828.62,377.95 cw(c2828.62,316.81) 2889.76,316.81 ccw(c2930.85,316.81) 2930.85,275.73 P12.2@2977,275.73
NetP12_3: P12.3 U4.15 | length 842
  Top Layer w10: U4.15 2492.2,370.16 cw(c2535.43,370.16) 2535.43,413.39 2984.31,413.39 cw(c2984.31,322.89) 3074.8,322.89 cw(c3058.63,322.89) 3058.63,306.73 P12.3@2977,306.73
NetR15_2: R15.2 R16.1 U4.19 | length 333.4
  Top Layer w10: U4.19 2594.57,255.83 ccw(c2610.24,255.83) 2610.24,240.16 2681.1,240.16 cw(c2681.1,181.1) R16.1 2846.46,181.1 R15.2
NetR29_2: R29.2 U3.9 | length 119.3
  Top Layer w10: U3.9 1663.39,913.32 ccw(c1671.75,913.32) R29.2
NetR30_1: R30.1 U7.7 Y2.1 | length 245.5
  Top Layer w10: R30.1 cw(c421.26,1538.04) 421.26,1541.97 ccw(c449.54,1541.97) 449.54,1513.7 Y2.1 544.89,1513.7 cw(c544.89,1503.94) 554.65,1503.94 ccw(c570.39,1503.94) 570.39,1488.19 U7.7
NetR30_2: R30.2 U7.8 Y2.3 | length 250.4
  Top Layer w10: R30.2 ccw(c446.15,1448.04) 446.15,1419.21 Y2.3 559.29,1419.21 ccw(c559.29,1433.07) 573.15,1433.07 cw(c596.77,1433.07) 596.77,1456.69 U7.8
RAD_RX: P6.2 U4.1 | length 2425.2
  Top Layer w10: P6.2 1665.35,1570.87 ccw(c1716.54,1570.87) 1716.54,1519.69 v2(1716.54,1523.62) ; v1(2822.83,648.53) 2824.88,648.53 U4.1
  Bottom Layer w10: v2(1716.54,1523.62) 1716.54,750.39 ccw(c1816.54,750.39) 1816.54,650.39 2692.13,650.39 2820.97,650.39 cw(c2820.97,648.53) v1(2822.83,648.53)
RAD_TX: P6.3 U4.5 | length 2239.3
  Top Layer w10: v2(1763.78,1523.62) P6.3 ; v1(2719.1,674.35) 2722.52,674.35 U4.5
  Bottom Layer w10: v2(1763.78,1523.62) 1763.78,774.35 ccw(c1863.78,774.35) 1863.78,674.35 v1(2719.1,674.35)
RESET: C37.2 C48.2 P10.3 R31.2 U7.29 | length 539.8
  Top Layer w10: P10.3 723.62,1988.98 ccw(c755.91,1988.98) 755.91,1956.69 858.82,1956.69 ccw(c858.82,1960.63) C37.2 C48.2 791.34,1874.02 cw(c791.34,1870.08) 795.28,1870.08 U7.29
RXD: U1.2 U7.30 | length 2720.4
  Top Layer w10: v1(763.78,1681.1) U7.30 ; v1(2425.2,778.35) U1.2
  Bottom Layer w10: v1(763.78,1681.1) 763.78,1704.72 cw(c791.34,1704.72) 791.34,1732.28 1659.06,1732.28 cw(c1659.06,1579.92) 1811.42,1579.92 1811.42,830.71 ccw(c1863.78,830.71) 1863.78,778.35 v1(2425.2,778.35)
SCL: R28.2 U3.23 U7.28 | length 1398.1
  Top Layer w10: U7.28 826.77,1694.13 v1(836.61,1684.28) ; U3.23 1643.7,1202.76 1643.7,1211.39 cw(c1662.63,1211.39) v1(1662.63,1230.32) 1662.63,1269.02 cw(c1672.27,1269.02) R28.2
  Bottom Layer w10: v1(836.61,1684.28) 1524.02,1684.28 cw(c1524.02,1545.67) 1662.63,1545.67 v1(1662.63,1230.32)
SDA: R27.2 U3.24 U7.27 | length 1350.4
  Top Layer w10: U7.27 858.27,1653.54 v1(866.14,1645.67) ; R27.2 1624.02,1242.26 v1(1624.02,1224.41) U3.24
  Bottom Layer w10: v1(866.14,1645.67) 1524.02,1645.67 cw(c1524.02,1545.67) 1624.02,1545.67 v1(1624.02,1224.41)
TXD: U1.3 U7.31 | length 2728.4
  Top Layer w10: U7.31 v1(732.28,1811.02) ; v1(2425.2,830.71) cw(c2425.2,828.35) 2427.56,828.35 U1.3
  Bottom Layer w10: v1(732.28,1811.02) ccw(c758.66,1811.02) 758.66,1784.65 1763.78,1784.65 cw(c1763.78,1684.65) 1863.78,1684.65 1863.78,927.56 ccw(c1960.63,927.56) 1960.63,830.71 v1(2425.2,830.71)
V3.3: C44.1 C46.2 C49.2 R27.1 R28.1 U3.8 U3.13 U13.5 | length 2812.9
  Top Layer w10: C46.2 1587.62,917.18 cw(c1618.11,917.18) 1618.11,947.67 ccw(c1618.11,973.26) 1643.7,973.26 U3.8 ; U3.13 1824.23,1053.15 ccw(c1824.23,1072.09) C44.1 1874.17,1072.09 2053.82,1251.74 2053.82,1457.99 ccw(c2051.18,1457.99) 2051.18,1460.63
  Top Layer w20: C46.2 1516.52,904.96 cw(c1516.52,1004.96) 1416.52,1004.96 1416.52,1268.65 cw(c1516.52,1268.65) 1516.52,1368.65 R28.1 cw(c1764.24,1368.65) 1672.28,1369.96 cw(c1764.24,1368.65) 1764.24,1460.63 2051.18,1460.63 2208.35,1460.63 ccw(c2208.35,1531.81) 2279.53,1531.81 2279.53,1685.04 cw(c2370.08,1685.04) 2370.08,1775.59 2450.39,1775.59 cw(c2450.39,1720.47) C49.2 ccw(c2513.39,1720.47) 2513.39,1712.6 U13.5
pads on no net: P2.0 P6.0 P11. P11.0 P11.1 P11.NC P12. P12.0 P12.NC P13.0 P14.0 P15.0 P17.0 U1.9 U1.10 U1.11 U1.12 U1.14 U1.15 U3.2 U3.3 U3.4 U3.5 U3.6 U3.7 U3.12 U3.14 U3.15 U3.16 U3.17 U3.19 U3.21 U3.22 U3.25 U4.2 U4.3 U4.6 U4.8 U4.9 U4.10 U4.11 U4.12 U4.13 U4.14 U4.22 U4.23 U4.24 U4.27 U4.28 U7.19 U7.22 U7.23 U7.24 U7.25 U7.26 Y2.2

## Polygon pours and split planes (outlines as drawn)
no net on Top Layer "BAT_L01_P000" (hatched 90Degree grid 20 track 8, remove dead copper, pour order 0): 2196.85,2377.95
GND on Top Layer "Top Layer-GND 2" (solid, remove dead copper, pour order 24): 0,0
GND on Top Layer "Top Layer-GND 1" (solid, remove dead copper, pour order 38): 4437.01,2074.8
GND on Top Layer "Top Layer-GND" (solid, remove dead copper, pour order 50): 1858.27,2728.35
GND on Top Layer "Top Layer-GND 7" (solid, remove dead copper, pour order 60): 0,2208.66
GND on Top Layer "Top Layer-GND 6" (solid, remove dead copper, pour order 62): -114.17,2460.63 751.97,2460.63
GND on Top Layer "Top Layer-GND 5" (solid, remove dead copper, pour order 64): -82.68,2519.69
GND on Top Layer "Top Layer-GND 4" (solid, remove dead copper, pour order 66): 2161.42,2401.57
no net on Bottom Layer "Bottom Layer-BAT" (hatched 90Degree grid 20 track 8, remove dead copper, pour order 8): 3808.27,-102.36
no net on Bottom Layer "Bottom Layer-No Net" (solid, remove dead copper, pour order 22): 2151.54,2138.35
GND on Bottom Layer "Bottom Layer-GND 2" (solid, remove dead copper, pour order 34): 0,0
GND on Bottom Layer "Bottom Layer-GND 1" (solid, remove dead copper, pour order 40): 2010.62,838.58
GND on Bottom Layer "Bottom Layer-No Net" (solid, remove dead copper, pour order 14): -122.05,2389.76 -90.55,2358.27 3555.12,2358.27 3555.12,-110.24 3496.06,-169.29 3484.25,-157.48 -188.98,-157.48

## Keep-outs
Keep-Out Layer:
  lines w10: 0,2105.44 cw(c98.43,2105.44) 98.43,2203.87 ; 0,2106.3 0,98.43 ccw(c98.43,98.43) 98.43,0 3248.03,0 ccw(c3248.03,98.43) 3346.46,98.43 3346.46,2106.3 ccw(c3248.03,2106.3) 3248.03,2204.72 98.43,2204.72

## Other copper
Top Layer:
  rectangle net 5V: 755.51,770.62 787.4,981.26
  rectangle net 12V: 907.41,771.64 1122.23,866.14
  rectangle net GND: 855.17,500 894.08,632.15
  rectangle net GND: 703.88,482.73 744.09,632.15
  rectangle net GND: 2741.71,236.22 2780.93,321.21
  rectangle net 12V: 503.39,681.1 614.17,866.14
  rectangle net 12V: 503.39,771.65 661.42,866.14
  rectangle net AO1: 645.08,531.5 692.91,724.41
  rectangle net AO1: 400.23,267.72 468.5,732.28
  rectangle net AO1: 400.23,267.72 507.87,464.57
  rectangle net AO2: 700.79,60.88 1011.81,153.94
  rectangle net AO2: 929.13,60.88 1011.81,448.82
  rectangle net AO2: 755.91,531.5 792.52,724.24
  rectangle net BO2: 805.82,531.5 846.46,724.24
  rectangle net BO1: 929.13,531.5 1007.87,724.41
  rectangle net BO2: 805.82,655.59 913.39,724.24
  rectangle net BO1: 913.39,531.5 984.25,633.86
  rectangle net BO1: 1783.46,94.49 1846.46,452.76
  rectangle net BO2: 1291.34,62.99 1350.39,452.76
  rectangle net BO2: 1291.34,60.88 1409.45,125.98
  region: 3543.31,2181.1
Bottom Layer:
  rectangle net AO1: 400.23,633.86 692.91,732.28
  rectangle net AO2: 700.79,59.06 795.28,196.85
  rectangle net AO2: 755.91,66.93 795.28,724.24
  rectangle net BO1: 929.13,531.5 1007.87,724.41
  rectangle net BO2: 805.82,655.59 913.39,724.24
  rectangle net BO2: 805.82,66.93 866.14,724.24
  rectangle net BO2: 805.82,62.99 1414.37,125.98
  rectangle net BO1: 929.13,192.91 1009,724.41
  rectangle net BO1: 929.13,192.91 1838.58,264.83
  rectangle net BO1: 1779.53,94.49 1846.46,266.29

## Silkscreen, mask and mechanical layers (free items; w line width, h text height)
Top Overlay:
  drawing of 6874 lines, arcs and shapes, not listed
  text "5V" at 118.96,1831.11 h39.37
  text "GND" at 102.91,1755.36 h39.37
  text "5V" at 2191.07,1614.17 h39.37
  text "GND" at 2171.38,1527.56 h39.37
  text "12V" at 2175.32,1452.76 h39.37
  text "GND" at 2171.38,1370.08 h39.37
  text "12V" at 105.12,469.27 h39.37
  text "GND" at 105.12,393.91 h39.37
Mechanical 1:
  rectangle: 703.88,488.19 735.25,625.98